# Altium PCB PCB1.PcbDoc
Units mm, origin at the board's own origin, x right, y up, seen from the top; angles counter-clockwise.
Board outline 152.4 x 101.6 mm, 2 copper layers (Top Layer, Bottom Layer); 6 components, 4 nets, 13 pads, 20 vias.
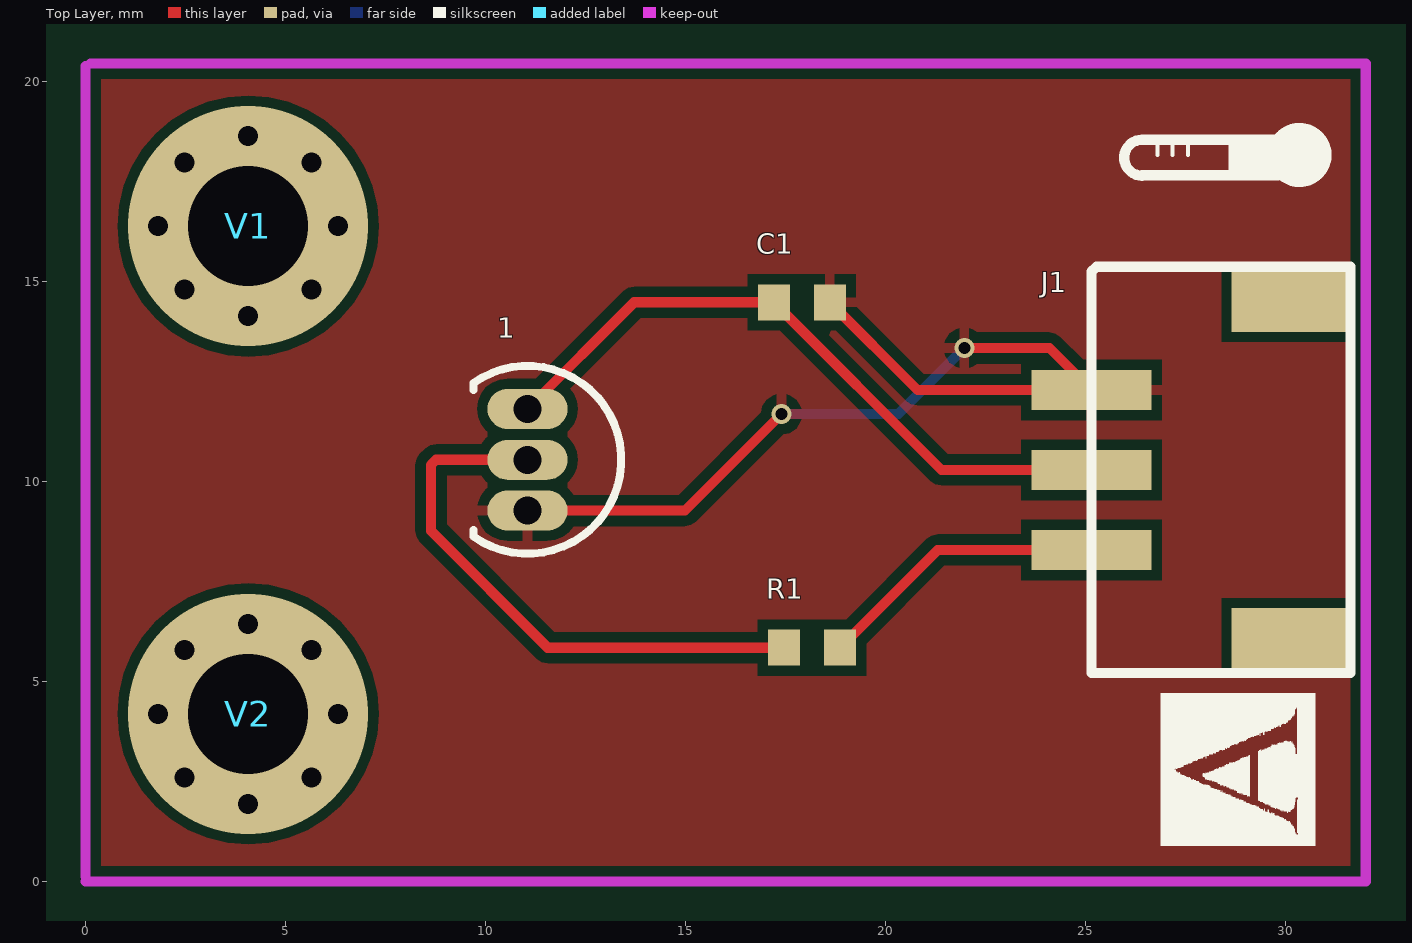
[diagram p0: Top Layer view]
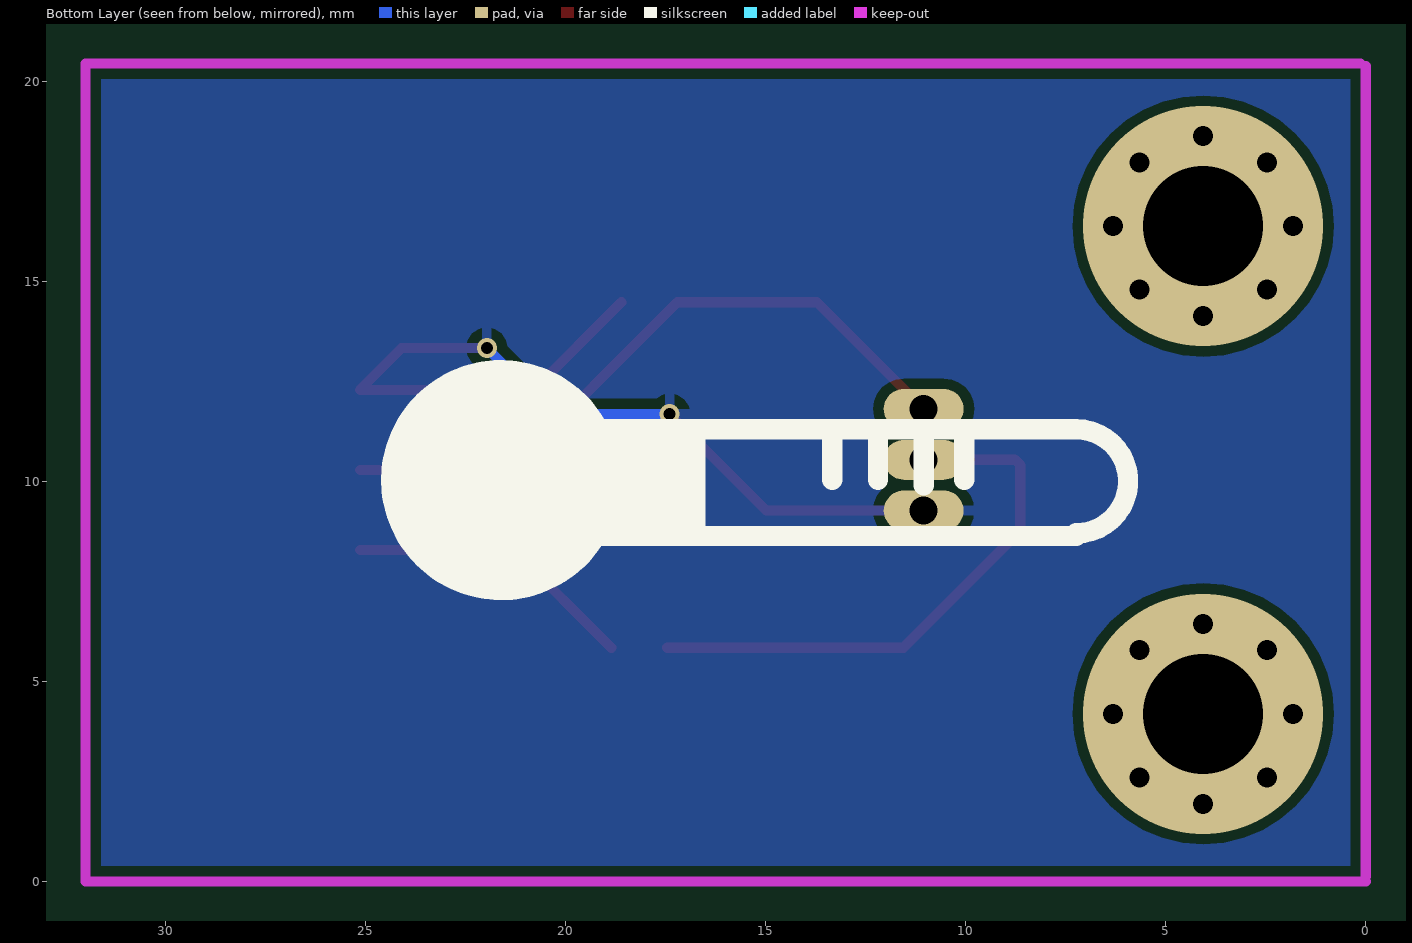
[diagram p1: Bottom Layer view, seen from below]

## Layer stack, top to bottom
Top Layer: signal copper 0.0356
Dielectric: dielectric 0.32, FR-4, Dk 4.8
Bottom Layer: signal copper 0.0356

## Board outline
-72.263,-40.259 80.137,-40.259 80.137,61.341 -72.263,61.341

## Design rules (kind name [scope] priority, off if disabled: settings)
Clearance [All] p1: gap=0.254
PolygonConnect [All] p1: connectstyle=Relief reliefconductorwidth=0.254 reliefentries=4 polygonreliefangle="90 Angle"
RoutingVias [All] p1: holewidth=0.711 width=1.27 viastyle="Through Hole" minholewidth=0.711 minwidth=1.27 maxholewidth=0.711 maxwidth=1.27
SilkscreenOverComponentPads [All] p1: minsilkscreentomaskgap=0.254
SolderMaskExpansion [All] p1: expansion=0.102
Width [All] p1: maxlimit=0.254 minlimit=0.254 preferedwidth=0.254
27 further rules are at their usual default settings.

## Components (designator, comment, footprint, x,y, rotation, side; value= is the part's Value field where it differs from the comment)
1 "LM35" TO-92 11.049,10.541 r180 top
C1 "CAP" 1608[0603] 17.907,14.478 r0 top
J1 "sh-2.0" sh-2.0 25.146,10.287 r90 top
R1 "RES" 1608[0603] 18.161,5.842 r180 top
V1 "Via" VIA 4.064,16.383 r0 top
V2 "Via" VIA 4.064,4.191 r0 top

## Footprints (in the part's own frame and the unit in brackets; to place one, negate y for a bottom-side part, rotate by r counter-clockwise, add the part's x,y. Pads: shape width x height; smd on the part's side, far side on the other; paste and mask are expansions set on the pad)
1608[0603] [mm] "Chip Capacitor, Body 1.6x0.8mm, IPC High Density"
  rect 0.8x0.9 smd: 1(-0.7,0) 2(0.7,0)
  body extent -0.87,-0.48 0.87,0.48, height 1.3
sh-2.0 [mm]
  rect 1x3 smd: 1(-2,0) 2(0,0) 3(2,0) 3(2,0)
  rect 1.5x3 smd: GND(-4.2,-5) GND(4.2,-5)
  silkscreen extent -5.08,-6.48 5.08,0
TO-92 [mm] "TO, Flat Index; 3 In-Line, Axial Leads; Body Dia. 4.6mm; Leads 0.41 x 0.39 mm (max)"
  oval 2x1 hole 0.7: 1(0,1.27) 2(0,0) 3(0,-1.27)
  silkscreen extent -2.34,-2.34 1.35,2.34
VIA [mm]

## Part data
1: library part LM317

## Via types
v1: diameter 1, hole 0.5, Top Layer to Bottom Layer, 16 vias
v2: diameter 6, hole 3, Top Layer to Bottom Layer, 2 vias
v3: diameter 0.5, hole 0.3, Top Layer to Bottom Layer, 2 vias

## Nets (pads, with @x,y where several pads share a name; then routed paths per layer and width w, separated by ;. In a path a pad name is that pad's centre, name@x,y a point inside that pad or via, vN(x,y) a via of type N, cw(c..) or ccw(c..) an arc to the next point about the centre after c; other vN are vias at no path point)
GND: 1.1 C1.2 J1.3 | length 23.7
  Top Layer w0.254: 1.1 14.986,9.271 v3(17.399,11.684) ; C1.2 20.798,12.287 25.146,12.287 24.098,13.335 v3(21.971,13.335)
  Bottom Layer w0.254: v3(17.399,11.684) 20.32,11.684 v3(21.971,13.335)
Net1_2: 1.2 R1.2 | length 14.2
  Top Layer w0.254: 1.2 8.763,10.541 8.636,10.414 8.636,8.763 11.557,5.842 R1.2
NetJ1_3: J1.1 R1.1 | length 7.3
  Top Layer w0.254: R1.1 21.306,8.287 J1.1
VCC: 1.3 C1.1 J1.2 | length 16.9
  Top Layer w0.254: 1.3 13.716,14.478 C1.1 21.398,10.287 J1.2
pads on no net: J1.GND
copper on no net:
  other v1: 4.064,1.941 2.473,2.6 5.655,2.6 1.814,4.191 6.314,4.191 2.473,5.782 5.655,5.782 4.064,6.441 4.064,14.133 2.473,14.792 5.655,14.792 1.814,16.383 6.314,16.383 2.473,17.974 5.655,17.974 4.064,18.633
  other v2: 4.064,4.191 4.064,16.383

## Polygon pours and split planes (outlines as drawn)
GND on Top Layer "Top Layer-No Net" (solid, pour order 4): 0,0 0,20.381 31.938,20.381 32.004,20.447 32.004,0
GND on Bottom Layer "Top Layer-No Net" (solid, pour order 6): 0,20.381 31.938,20.381 32.004,20.447 32.004,0 0,0

## Keep-outs
Keep-Out Layer:
  lines w0.254: 0,0 32.004,0 32.004,20.447 0.127,20.447 ; 0,0.127 0,20.381

## Silkscreen, mask and mechanical layers (free items; w line width, h text height)
Top Overlay:
  drawing of 1213 lines, arcs and shapes, not listed
Bottom Overlay:
  circle w3: c21.614,10.033 r1.5
  rectangle: 16.51,8.382 19.939,11.557
  lines w0.508: 7.239,8.636 16.51,8.636 ; 7.239,8.703 cw(c7.239,10.003) 7.239,11.303 16.51,11.303 ; 10.033,10.033 10.033,11.303 ; 11.049,9.906 11.049,11.303 ; 12.192,10.033 12.192,11.303 ; 13.335,10.033 13.335,11.303
Top Solder:
  circle w0.5: c12.831,17.018 r0.25
  text "LM35 Temperature" at 8.509,3.429 h1
  text "Sensor" at 8.509,1.397 h1